# EAGLE board stm32f103c8t6_tft_v04-ut-mirror (EAGLE 6.6.0)
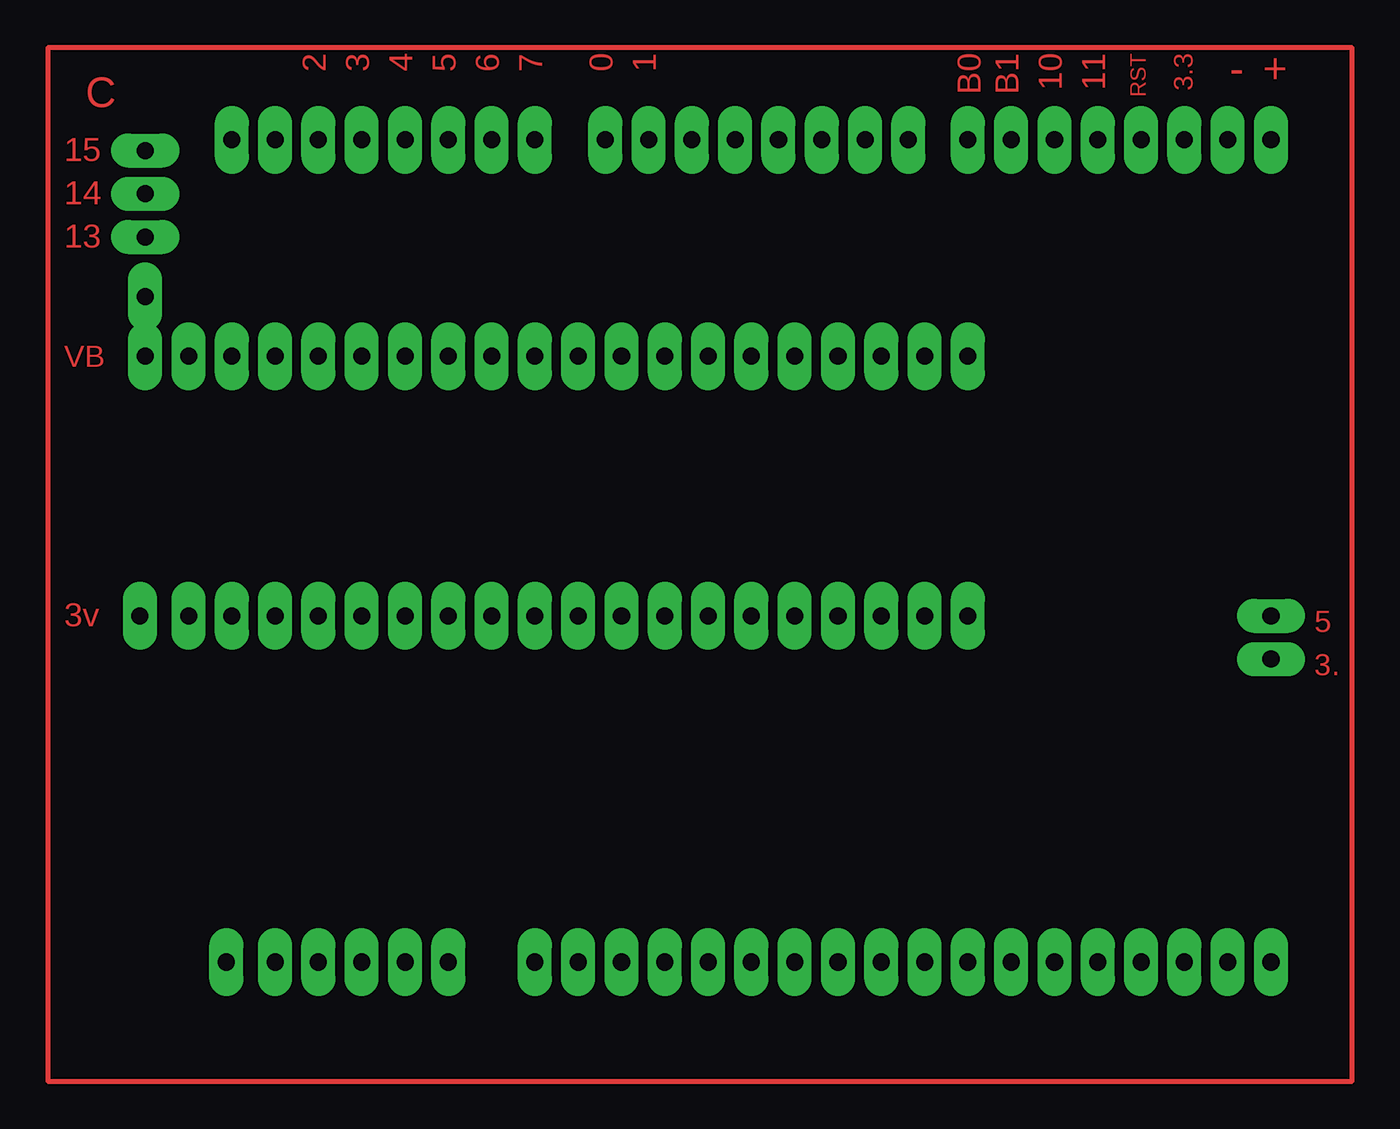
[diagram p0: board, top side]
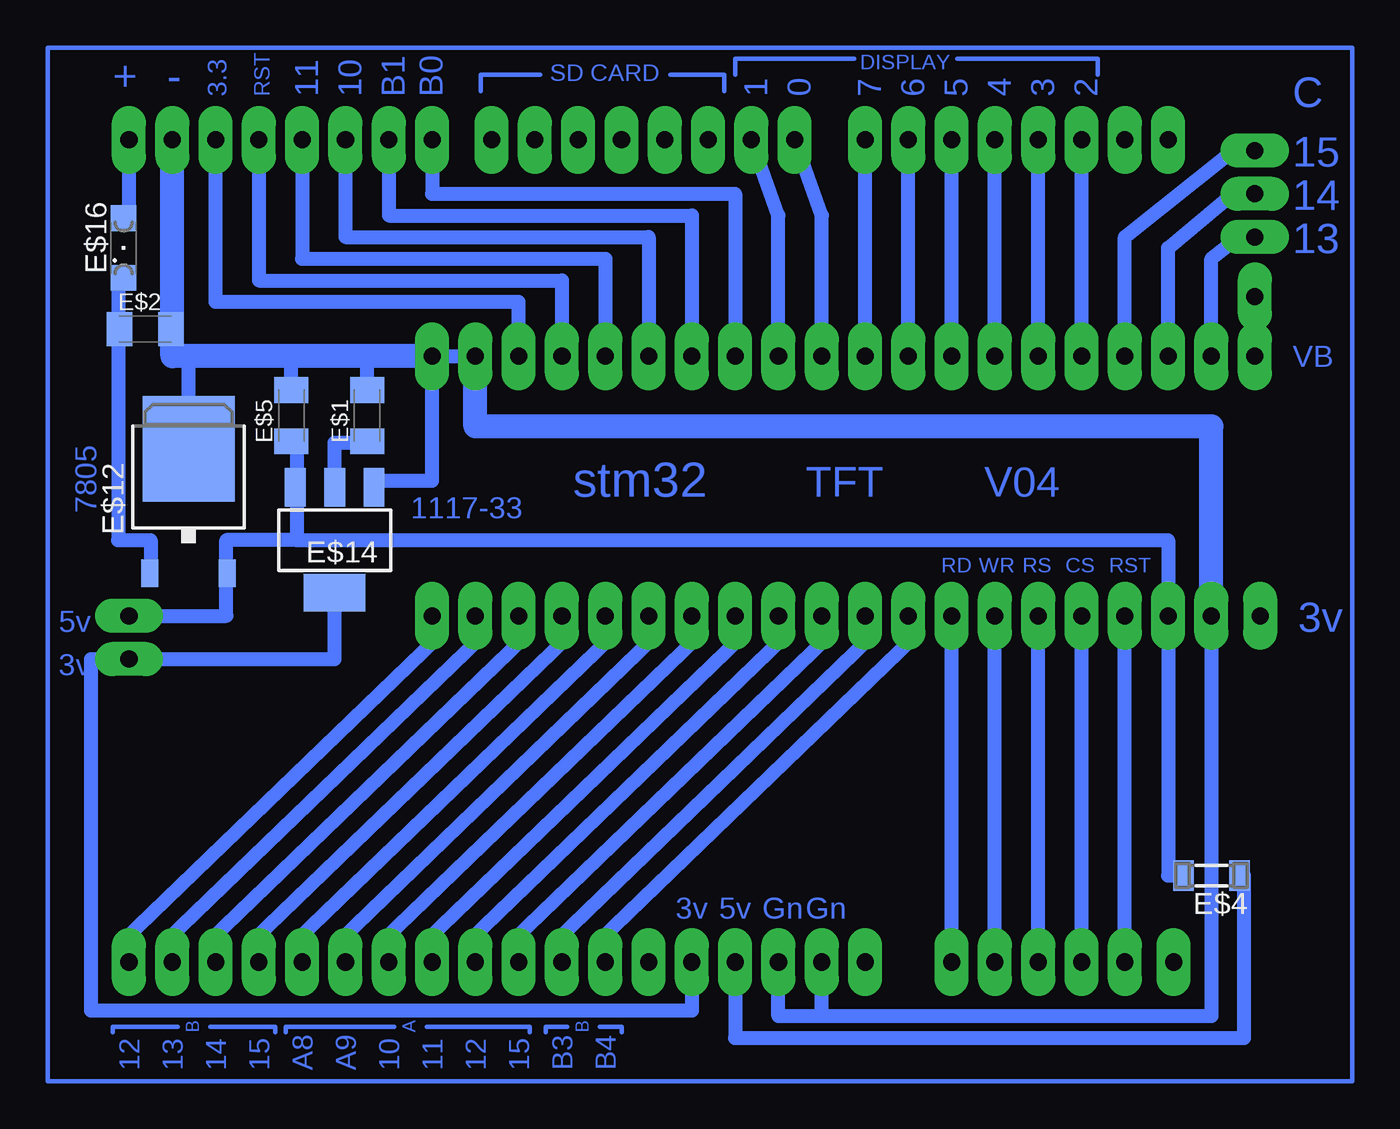
[diagram p1: board, bottom side, seen from below]

No outline drawn. Coordinates in mm, seen from the top.
Copper layers (1*16): Top 0.035mm / dielectric 1.5mm / Bottom 0.035mm
Design rules "default": minimum track width 10mil, minimum drill 24mil, track to track 8mil, track to pad 8mil, pad to pad 8mil, via to via 8mil, smd to smd 8mil, copper to edge 40mil, drill to drill 8mil, minimum pad ring 10mil, minimum via ring 8mil, stop-mask expansion 4mil, vias tented up to drill 0mil, thermal gap 10mil

## Footprints (pad centres in the part's own frame; a part is rotated, then mirrored left to right if it is on the bottom)
C1206K = smd 1.5 x 2: 1 -1.5,0; 2 1.5,0
SM-1206 = smd 1.2 x 1.8: 1 -1.65,0; 2 1.65,0
1X1-BIGPOGO = drill 1 pad 2 long: P$1 0,0
TO252 = smd 1 x 1.6: 1 -2.28,-4.8; 2 2.28,-4.8 | smd 5.4 x 6.2: 3 0,2.5
SOT223 = smd 1.219 x 2.235: 1 -2.311,-3.099; 2 0,-3.099; 3 2.311,-3.099 | smd 3.6 x 2.2: 4 0,3.099
SML1206 = smd 1.5 x 1.5: A 1.75,0; C -1.75,0

## Placement (x,y rotation side)
E$1  [C1206K]  57.78,39.05 90 bottom
E$2  [C1206K]  70.8,44.13 0 bottom
E$4  [SM-1206]  8.26,12.06 180 bottom
E$5  [C1206K]  62.23,39.05 90 bottom
E$6  [1X1-BIGPOGO]  53.98,27.3 90 bottom
E$7  [1X1-BIGPOGO]  51.44,27.3 90 bottom
E$8  [1X1-BIGPOGO]  48.9,27.3 90 bottom
E$9  [1X1-BIGPOGO]  46.35,27.3 90 bottom
E$10  [1X1-BIGPOGO]  43.81,27.3 90 bottom
E$11  [1X1-BIGPOGO]  41.27,27.3 90 bottom
E$12  [TO252]  68.26,34.61 0 bottom
E$13  [1X1-BIGPOGO]  38.73,27.3 90 bottom
E$14  [SOT223]  59.69,31.75 180 bottom
E$15  [1X1-BIGPOGO]  36.2,27.3 90 bottom
E$16  [SML1206]  72.07,48.9 90 bottom
E$17  [1X1-BIGPOGO]  33.66,27.3 90 bottom
E$18  [1X1-BIGPOGO]  31.11,27.3 90 bottom
E$19  [1X1-BIGPOGO]  28.57,27.3 90 bottom
E$20  [1X1-BIGPOGO]  26.04,27.3 90 bottom
E$21  [1X1-BIGPOGO]  23.5,27.3 90 bottom
E$22  [1X1-BIGPOGO]  20.95,27.3 90 bottom
E$23  [1X1-BIGPOGO]  18.41,27.3 90 bottom
E$24  [1X1-BIGPOGO]  15.88,27.3 90 bottom
E$25  [1X1-BIGPOGO]  13.34,27.3 90 bottom
E$26  [1X1-BIGPOGO]  10.79,27.3 90 bottom
E$27  [1X1-BIGPOGO]  8.26,27.3 90 bottom
E$28  [1X1-BIGPOGO]  5.4,27.3 270 bottom
E$29  [1X1-BIGPOGO]  53.98,42.55 90 bottom
E$30  [1X1-BIGPOGO]  51.44,42.55 90 bottom
E$31  [1X1-BIGPOGO]  48.9,42.55 90 bottom
E$32  [1X1-BIGPOGO]  46.35,42.55 90 bottom
E$33  [1X1-BIGPOGO]  43.81,42.55 90 bottom
E$34  [1X1-BIGPOGO]  41.27,42.55 90 bottom
E$35  [1X1-BIGPOGO]  38.73,42.55 90 bottom
E$36  [1X1-BIGPOGO]  36.2,42.55 90 bottom
E$37  [1X1-BIGPOGO]  33.66,42.55 90 bottom
E$38  [1X1-BIGPOGO]  31.11,42.55 90 bottom
E$39  [1X1-BIGPOGO]  28.57,42.55 90 bottom
E$40  [1X1-BIGPOGO]  26.04,42.55 90 bottom
E$41  [1X1-BIGPOGO]  23.5,42.55 90 bottom
E$42  [1X1-BIGPOGO]  20.95,42.55 90 bottom
E$43  [1X1-BIGPOGO]  18.41,42.55 90 bottom
E$44  [1X1-BIGPOGO]  15.88,42.55 90 bottom
E$45  [1X1-BIGPOGO]  13.34,42.55 90 bottom
E$46  [1X1-BIGPOGO]  10.79,42.55 90 bottom
E$47  [1X1-BIGPOGO]  8.26,42.55 90 bottom
E$48  [1X1-BIGPOGO]  5.71,42.55 90 bottom
E$49  [1X1-BIGPOGO]  71.75,6.99 90 top
E$50  [1X1-BIGPOGO]  69.22,6.99 90 bottom
E$51  [1X1-BIGPOGO]  66.67,6.99 90 bottom
E$52  [1X1-BIGPOGO]  64.14,6.99 90 bottom
E$53  [1X1-BIGPOGO]  61.59,6.99 90 bottom
E$54  [1X1-BIGPOGO]  59.05,6.99 90 bottom
E$55  [1X1-BIGPOGO]  56.52,6.99 90 bottom
E$56  [1X1-BIGPOGO]  53.98,6.99 90 bottom
E$57  [1X1-BIGPOGO]  51.44,6.99 90 bottom
E$58  [1X1-BIGPOGO]  48.9,6.99 90 bottom
E$59  [1X1-BIGPOGO]  46.35,6.99 90 bottom
E$60  [1X1-BIGPOGO]  43.81,6.99 90 bottom
E$61  [1X1-BIGPOGO]  41.27,6.99 90 bottom
E$62  [1X1-BIGPOGO]  38.73,6.99 90 bottom
E$63  [1X1-BIGPOGO]  36.2,6.99 90 bottom
E$64  [1X1-BIGPOGO]  33.66,6.99 90 bottom
E$65  [1X1-BIGPOGO]  31.11,6.99 90 bottom
E$66  [1X1-BIGPOGO]  28.57,6.99 90 bottom
E$67  [1X1-BIGPOGO]  23.5,6.99 90 bottom
E$68  [1X1-BIGPOGO]  20.95,6.99 90 bottom
E$69  [1X1-BIGPOGO]  18.41,6.99 90 bottom
E$70  [1X1-BIGPOGO]  15.88,6.99 90 bottom
E$71  [1X1-BIGPOGO]  13.34,6.99 90 bottom
E$72  [1X1-BIGPOGO]  10.48,6.99 90 bottom
E$73  [1X1-BIGPOGO]  71.75,55.24 90 bottom
E$74  [1X1-BIGPOGO]  69.22,55.24 90 bottom
E$75  [1X1-BIGPOGO]  66.67,55.24 90 bottom
E$76  [1X1-BIGPOGO]  64.14,55.24 90 bottom
E$77  [1X1-BIGPOGO]  61.59,55.24 90 bottom
E$78  [1X1-BIGPOGO]  59.05,55.24 90 bottom
E$79  [1X1-BIGPOGO]  56.52,55.24 90 bottom
E$80  [1X1-BIGPOGO]  53.98,55.24 90 bottom
E$81  [1X1-BIGPOGO]  50.48,55.24 90 bottom
E$82  [1X1-BIGPOGO]  47.94,55.24 90 bottom
E$83  [1X1-BIGPOGO]  45.4,55.24 90 bottom
E$84  [1X1-BIGPOGO]  42.86,55.24 90 bottom
E$85  [1X1-BIGPOGO]  40.32,55.24 90 bottom
E$86  [1X1-BIGPOGO]  37.78,55.24 90 bottom
E$87  [1X1-BIGPOGO]  35.24,55.24 90 bottom
E$88  [1X1-BIGPOGO]  32.7,55.24 90 bottom
E$89  [1X1-BIGPOGO]  28.57,55.24 90 bottom
E$90  [1X1-BIGPOGO]  26.04,55.24 90 bottom
E$91  [1X1-BIGPOGO]  23.5,55.24 90 bottom
E$92  [1X1-BIGPOGO]  20.95,55.24 90 bottom
E$93  [1X1-BIGPOGO]  18.41,55.24 90 bottom
E$94  [1X1-BIGPOGO]  15.88,55.24 90 bottom
E$95  [1X1-BIGPOGO]  13.34,55.24 90 bottom
E$96  [1X1-BIGPOGO]  10.79,55.24 90 bottom
E$97  [1X1-BIGPOGO]  5.71,46.04 90 bottom

## Library data of the parts
E$1 E$2 E$5-E$13 E$15 E$17-E$97 = adafruit
E$4 = inductor-neosid
E$14 = transistor-pnp
E$16 = led

## Tracks (layer width: path | path; a pad name or v marks a point on that pad's centre or on a via)
S$1
  Bottom 0.813: 15.88,42.55 15.88,55.24
S$2
  Bottom 0.813: 18.41,42.55 18.41,55.24
S$3
  Bottom 0.813: 20.95,42.55 20.95,55.24
S$4
  Bottom 0.813: 26.04,42.55 26.04,55.24
S$5
  Bottom 0.813: 28.57,42.55 28.57,55.24
S$6
  Bottom 0.813: 31.11,42.55 31.11,50.8 32.7,55.24
S$7
  Bottom 0.813: 13.34,6.99 13.34,27.3
S$8
  Bottom 0.813: 15.88,6.99 15.88,27.3
S$9
  Bottom 0.813: 18.41,6.99 18.41,27.3
S$10
  Bottom 0.813: 20.95,6.99 20.95,27.3
S$11
  Bottom 0.813: 23.5,6.99 23.5,27.3
S$12  (via drill 1 pad 2)
  Bottom 0.813: 59.69,28.89 59.69,24.77 v71.75,24.77 73.98,24.77 73.98,4.13 38.73,4.13 38.73,6.99
S$13
  Bottom 0.813: 72.39,46.99 72.39,31.75 70.48,31.75 70.48,29.53
S$14
  Bottom 0.813: 33.66,42.55 33.66,50.8 35.24,55.24
S$16
  Bottom 0.813: 59.69,34.92 59.69,37.47 57.78,37.47
S$18
  Bottom 0.254: 47.62,59.05 51.12,59.05 51.12,58.1
S$19
  Bottom 0.813: 68.26,37.78 68.26,42.55
S$20
  Bottom 0.254: 40.01,59.05 36.83,59.05 36.83,58.1
S$21
  Bottom 0.813: 23.5,42.55 23.5,55.24
S$22
  Bottom 0.813: 64.14,55.24 64.14,46.99 46.35,46.99 46.35,42.55
S$23
  Bottom 0.813: 61.59,55.24 61.59,48.26 43.81,48.26 43.81,42.55
S$25  (via drill 1 pad 2)
  Bottom 0.813: 61.91,31.75 10.79,31.75 10.79,12.06 9.84,12.06 | 61.91,37.47 61.91,31.75 | 61.91,31.75 66.04,31.75 66.04,27.3 v71.75,27.3
S$26
  Top 0.305: 0,60.64 0,0 76.52,0 76.52,60.64 0,60.64
S$27
  Bottom 0.254: 63.18,2.86 63.18,3.17 66.99,3.17
S$28
  Bottom 0.254: 48.26,2.86 48.26,3.17 54.29,3.17
S$29
  Bottom 0.254: 68.9,3.17 72.71,3.17 72.71,2.86
S$30
  Bottom 0.254: 46.04,3.17 47.31,3.17 47.31,2.86
S$31
  Bottom 0.254: 42.86,2.86 42.86,3.17 44.13,3.17
S$32
  Bottom 0.254: 56.2,3.17 62.55,3.17 62.55,2.86
S$33
  Bottom 0.254: 36.2,59.05 36.2,60.01 29.21,60.01
S$34
  Bottom 0.813: 71.75,55.24 71.75,50.8
S$35
  Bottom 0.254: 23.18,60.01 14.92,60.01 14.92,59.05
S$36
  Bottom 0.813: 57.47,34.29 57.47,35.24 53.98,35.24 53.98,42.55 51.44,42.55 | 57.78,40.32 57.78,42.55 | 62.23,40.32 62.23,42.55 | 8.26,27.3 8.26,3.81 31.11,3.81 | 31.11,3.81 31.11,6.99 | 31.11,3.81 33.66,3.81 33.66,6.99
  Bottom 1.422: 53.98,42.55 57.78,42.55 62.23,42.55 69.22,42.55 69.22,55.24 | 8.26,27.3 8.26,38.42 51.44,38.42 51.44,42.55
S$43
  Bottom 0.254: 76.52,0 0,0 0,60.64 76.52,60.64 76.52,0
S$49
  Bottom 0.813: 59.05,55.24 59.05,49.53 41.27,49.53 41.27,42.55
S$50
  Bottom 0.813: 56.52,55.24 56.52,50.8 38.73,50.8 38.73,42.55
S$51
  Bottom 0.813: 53.98,55.24 53.98,52.07 36.2,52.07 36.2,42.55
S$67
  Bottom 0.813: 36.2,6.99 36.2,2.54 6.35,2.54 6.35,12.06
S$70
  Bottom 0.813: 5.71,42.55 5.71,46.04
S$71
  Bottom 0.813: 48.9,42.55 48.9,45.72 66.67,45.72 66.67,55.24
S$85  (via drill 1 pad 2)
  Bottom 0.813: 13.34,42.55 13.34,49.53 6.99,54.61 v5.71,54.61
S$86  (via drill 1 pad 2)
  Bottom 0.813: 10.79,42.55 10.79,48.9 6.99,52.07 v5.71,52.07
S$87  (via drill 1 pad 2)
  Bottom 0.813: 8.26,42.55 8.26,48.26 6.67,49.53 v5.71,49.53
S$99
  Bottom 0.813: 46.67,8.26 28.26,26.04
S$115
  Bottom 0.813: 51.75,8.26 33.34,26.04
S$119
  Bottom 0.813: 44.13,8.26 25.72,26.04
S$121
  Bottom 0.813: 49.21,8.26 30.8,26.04
S$122
  Bottom 0.813: 72.07,8.26 53.66,26.04
S$123
  Bottom 0.813: 69.53,8.26 51.12,26.04
S$124
  Bottom 0.813: 66.99,8.26 48.58,26.04
S$125
  Bottom 0.813: 64.45,8.26 46.04,26.04
S$126
  Bottom 0.813: 61.91,8.26 43.5,26.04
S$127
  Bottom 0.813: 59.37,8.26 40.96,26.04
S$128
  Bottom 0.813: 56.83,8.26 38.42,26.04
S$129
  Bottom 0.813: 54.29,8.26 35.88,26.04

## Text on the board
Top: 2 | 3 | 4 | 5 | 6 | 7 | 0 | 1 | B0 | B1 | 10 | 11 | RST | 3.3 | - | + | C | 15 | 14 | 13 | VB | 3v | 5 | 3.
Bottom: CARD | SD | DISPLAY | 2 | 3 | 4 | 5 | 6 | 7 | 0 | 1 | B0 | B1 | 10 | 11 | RST | 3.3 | - | + | C | 15 | 14 | 13 | VB | V04 | TFT | stm32 | 1117-33 | 7805 | RST | CS | RS | WR | RD | 3v | 5v | 3v | Gn | Gn | 5v | 3v | B | A | B | B4 | B3 | 15 | 12 | 11 | 10 | A9 | A8 | 15 | 14 | 13 | 12